# EAGLE board charlie_matrix_20 (EAGLE 5.11)
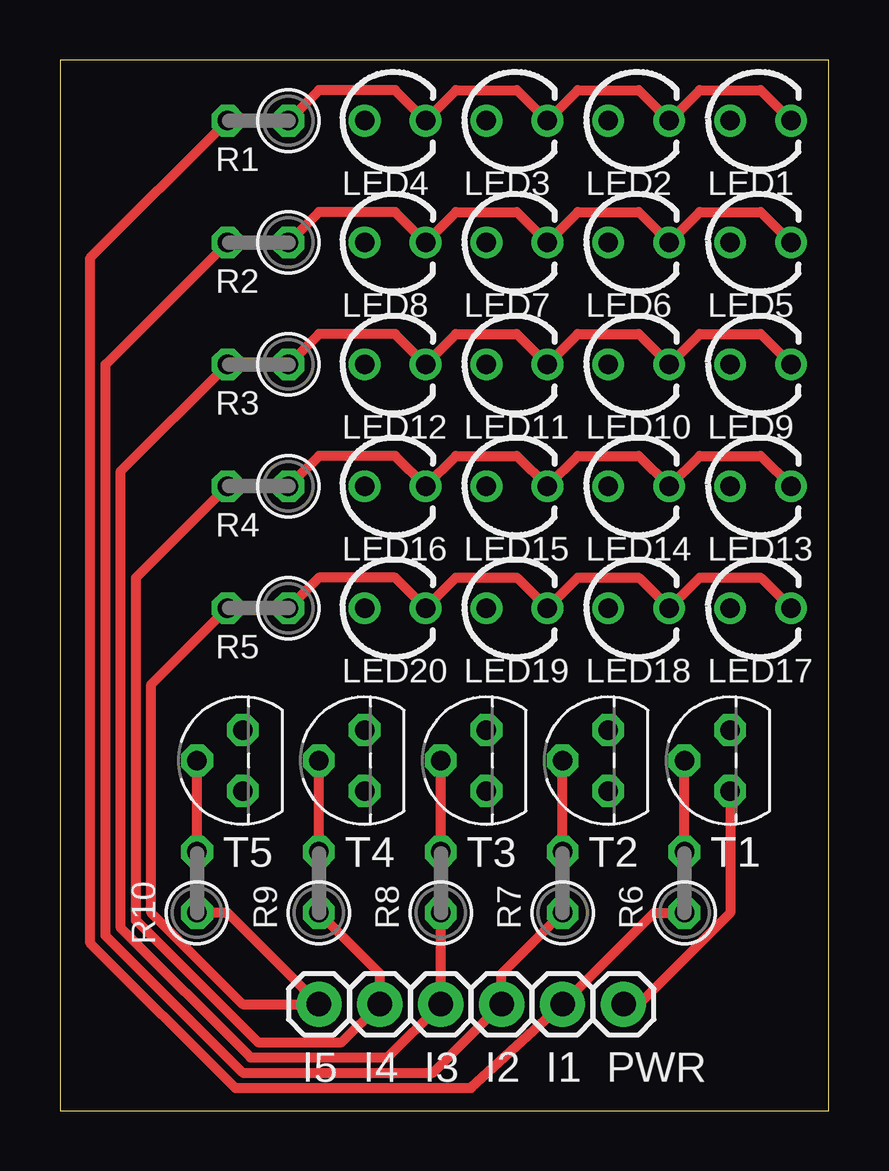
[diagram p0: board, top side]
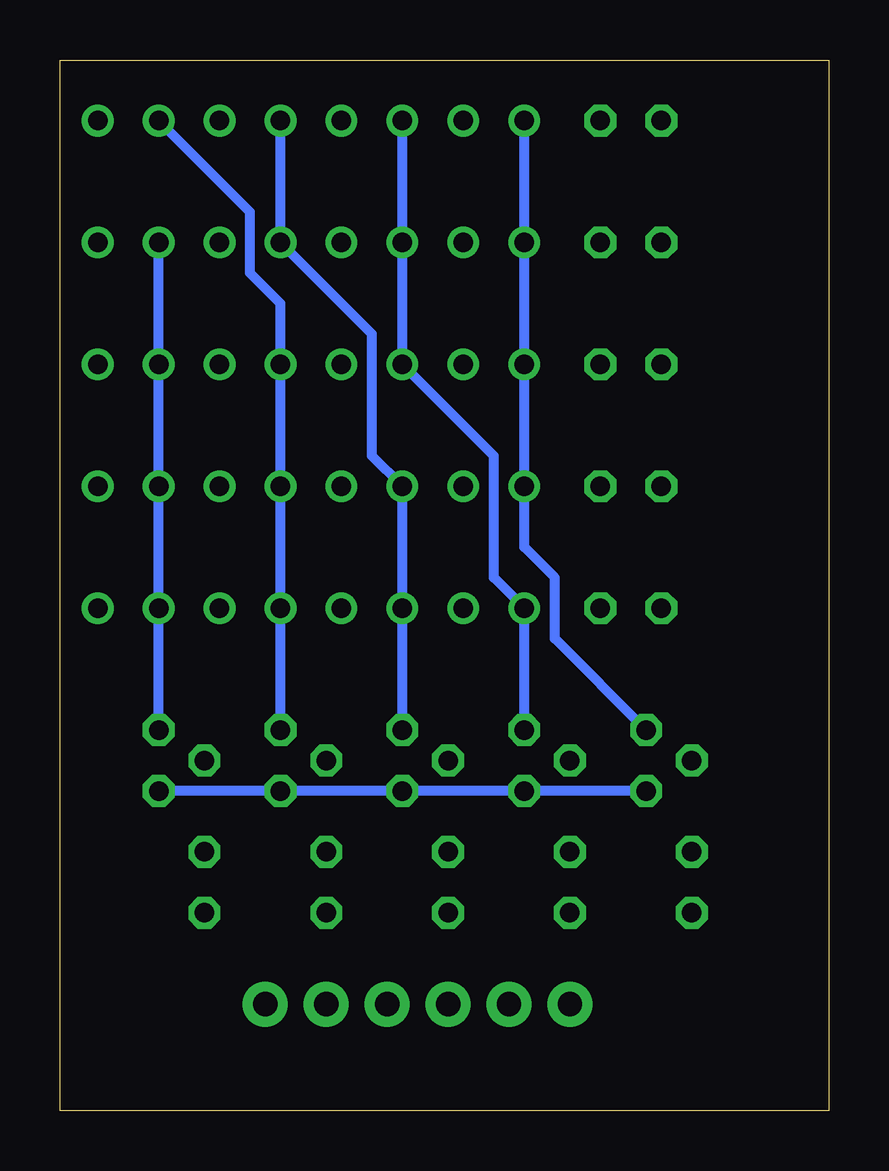
[diagram p1: board, bottom side, seen from below]

Size 32.05 x 43.8 mm. Coordinates in mm from the lower left corner, seen from the top.
Outline: 0,0 32.05,0 32.05,43.8 0,43.8 0,0
Copper layers (1*16): Top 0.035mm / dielectric 1.5mm / Bottom 0.035mm
Design rules "Fusion_eagle_rule_v1.1": minimum track width 6mil, minimum drill 12mil, track to track 6mil, track to pad 6mil, pad to pad 6mil, via to via 6mil, smd to smd 0mil, copper to edge 10mil, drill to drill 10mil, minimum pad ring 10mil, minimum via ring 6mil, stop-mask expansion 2mil, vias tented up to drill 100mil, thermal gap 10mil

## Footprints (pad centres in the part's own frame; a part is rotated, then mirrored left to right if it is on the bottom)
1X01 = drill 1.016 pad 1.88 round: 1 0,0
LED3MM = drill 0.813 round: A -1.27,0; K 1.27,0
0207/2V = drill 0.813 octagon: 1 -1.27,0; 2 1.27,0
TO92 = drill 0.813 octagon: 1 1.27,0; 2 0,1.905; 3 -1.27,0

## Placement (x,y rotation side)
I1  M01PTH  [1X01]  20.95,4.45 0 top
I2  M01PTH  [1X01]  18.41,4.45 0 top
I3  M01PTH  [1X01]  15.88,4.45 0 top
I4  M01PTH  [1X01]  13.34,4.45 0 top
I5  M01PTH  [1X01]  10.79,4.45 0 top
LED1  [LED3MM]  29.21,41.27 0 top
LED2  [LED3MM]  24.13,41.27 0 top
LED3  [LED3MM]  19.05,41.27 0 top
LED4  [LED3MM]  13.97,41.27 0 top
LED5  [LED3MM]  29.21,36.2 0 top
LED6  [LED3MM]  24.13,36.2 0 top
LED7  [LED3MM]  19.05,36.2 0 top
LED8  [LED3MM]  13.97,36.2 0 top
LED9  [LED3MM]  29.21,31.11 0 top
LED10  [LED3MM]  24.13,31.11 0 top
LED11  [LED3MM]  19.05,31.11 0 top
LED12  [LED3MM]  13.97,31.11 0 top
LED13  [LED3MM]  29.21,26.04 0 top
LED14  [LED3MM]  24.13,26.04 0 top
LED15  [LED3MM]  19.05,26.04 0 top
LED16  [LED3MM]  13.97,26.04 0 top
LED17  [LED3MM]  29.21,20.95 0 top
LED18  [LED3MM]  24.13,20.95 0 top
LED19  [LED3MM]  19.05,20.95 0 top
LED20  [LED3MM]  13.97,20.95 0 top
PWR  M01PTH  [1X01]  23.5,4.45 0 top
R1  [0207/2V]  8.26,41.27 180 top
R2  [0207/2V]  8.26,36.2 180 top
R3  [0207/2V]  8.26,31.11 180 top
R4  [0207/2V]  8.26,26.04 180 top
R5  [0207/2V]  8.26,20.95 180 top
R6  [0207/2V]  26.04,9.53 90 top
R7  [0207/2V]  20.95,9.53 90 top
R8  [0207/2V]  15.88,9.53 90 top
R9  [0207/2V]  10.79,9.53 90 top
R10  [0207/2V]  5.71,9.53 90 top
T1  BC238  [TO92]  27.94,14.61 90 top
T2  BC238  [TO92]  22.86,14.61 90 top
T3  BC238  [TO92]  17.78,14.61 90 top
T4  BC238  [TO92]  12.7,14.61 90 top
T5  BC238  [TO92]  7.62,14.61 90 top

## Library data of the parts
I1-I5 PWR = SparkFun
LED1-LED20 R1-R10 = CyberRailGuru
T1-T5 = transistor-neu-to92

## Nets
N$1: LED17.K LED18.K LED19.K LED20.K R5.1
N$2: LED13.K LED14.K LED15.K LED16.K R4.1
N$3: LED9.K LED10.K LED11.K LED12.K R3.1
N$4: LED5.K LED6.K LED7.K LED8.K R2.1
N$5: LED1.K LED2.K LED3.K LED4.K R1.1
N$6: LED4.A LED8.A LED12.A LED16.A T5.1
N$7: LED3.A LED7.A LED11.A LED20.A T4.1
N$8: LED2.A LED6.A LED15.A LED19.A T3.1
N$10: LED5.A LED9.A LED13.A LED17.A T1.1
N$14: LED1.A LED10.A LED14.A LED18.A T2.1
N$15: R6.2 T1.2
N$16: R7.2 T2.2
N$17: R8.2 T3.2
N$18: R9.2 T4.2
N$19: R10.2 T5.2
OUT1: I1.1 R1.2 R6.1
OUT2: I2.1 R2.2 R7.1
OUT3: I3.1 R3.2 R8.1
OUT4: I4.1 R4.2 R9.1
OUT5: I5.1 R5.2 R10.1
VCC: PWR.1 T1.3 T2.3 T3.3 T4.3 T5.3

## Tracks (layer width: path | path; a pad name or v marks a point on that pad's centre or on a via)
N$1
  Top 0.406: LED17.K 29.21,22.23 26.67,22.23 LED18.K 24.13,22.23 21.59,22.23 LED19.K 19.05,22.23 16.51,22.23 LED20.K 13.97,22.23 10.79,22.23 R5.1
N$2
  Top 0.406: LED13.K 29.21,27.3 26.67,27.3 LED14.K 24.13,27.3 21.59,27.3 LED15.K 19.05,27.3 16.51,27.3 LED16.K 13.97,27.3 10.79,27.3 R4.1
N$3
  Top 0.406: LED9.K 29.21,32.38 26.67,32.38 LED10.K 24.13,32.38 21.59,32.38 LED11.K 19.05,32.38 16.51,32.38 LED12.K 13.97,32.38 10.79,32.38 R3.1
N$4
  Top 0.406: LED5.K 29.21,37.47 26.67,37.47 LED6.K 24.13,37.47 21.59,37.47 LED7.K 19.05,37.47 16.51,37.47 LED8.K 13.97,37.47 10.79,37.47 R2.1
N$5
  Top 0.406: LED1.K 29.21,42.55 26.67,42.55 LED2.K 24.13,42.55 21.59,42.55 LED3.K 19.05,42.55 16.51,42.55 LED4.K 13.97,42.55 10.79,42.55 R1.1
N$6
  Bottom 0.406: LED4.A LED8.A LED12.A LED16.A 12.7,23.5 11.43,22.23 11.43,19.68 T5.1
N$7
  Bottom 0.406: LED3.A LED7.A LED11.A 13.97,27.3 13.97,22.23 LED20.A T4.1
N$8
  Bottom 0.406: LED2.A LED6.A 19.05,32.38 19.05,27.3 LED15.A LED19.A T3.1
N$10
  Bottom 0.406: LED5.A LED9.A LED13.A LED17.A T1.1
N$14
  Bottom 0.406: LED1.A 24.13,37.47 24.13,34.92 22.86,33.66 LED10.A LED14.A LED18.A T2.1
N$15
  Top 0.406: R6.2 T1.2
N$16
  Top 0.406: R7.2 T2.2
N$17
  Top 0.406: R8.2 T3.2
N$18
  Top 0.406: R9.2 T4.2
N$19
  Top 0.406: R10.2 T5.2
OUT1
  Top 0.406: R1.2 1.27,35.56 1.27,6.99 7.3,0.95 17.14,0.95 I1.1 24.77,8.26 R6.1
OUT2
  Top 0.406: R2.2 1.91,31.11 1.91,7.3 7.62,1.59 15.56,1.59 I2.1 18.41,5.71 R7.1
OUT3
  Top 0.406: R3.2 2.54,26.67 2.54,7.62 7.94,2.22 13.65,2.22 I3.1 R8.1
OUT4
  Top 0.406: R4.2 3.17,22.23 3.17,7.94 8.26,2.86 11.75,2.86 I4.1 13.34,5.71 R9.1
OUT5
  Top 0.406: R5.2 3.81,17.78 3.81,8.26 7.62,4.45 I5.1 6.99,8.26 R10.1
VCC
  Top 0.406: PWR.1 24.13,4.45 27.94,8.26 T1.3
  Bottom 0.406: T5.3 T4.3 T3.3 T2.3 T1.3